# EAGLE board CT_schematic (EAGLE 7.6.0)

Size 100 x 80 mm. Coordinates in mm from the lower left corner, seen from the top.
Outline: 0,0 100,0 100,80 0,80 0,0
Copper layers (1*16): Top 0.035mm / dielectric 1.5mm / Bottom 0.035mm
Design rules "default": minimum track width 10mil, minimum drill 24mil, track to track 8mil, track to pad 8mil, pad to pad 8mil, via to via 8mil, smd to smd 8mil, copper to edge 40mil, drill to drill 8mil, minimum pad ring 10mil, minimum via ring 8mil, stop-mask expansion 4mil, vias tented up to drill 0mil, thermal gap 10mil

## Footprints (pad centres in the part's own frame; a part is rotated, then mirrored left to right if it is on the bottom)
C0603 = smd 0.8 x 0.8: 1 -0.762,0; 2 0.762,0
C0402 = smd 0.5 x 0.5: 1 -0.508,0; 2 0.508,0
C0805 = smd 1.2 x 1.3: 1 -1.016,0; 2 1.016,0
C1206 = smd 1.3 x 1.6: 1 -1.524,0; 2 1.524,0
2220 = smd 1.85 x 5.5: 1 -2.55,0; 2 2.55,0
EXV-9H = smd 3.505 x 1.676: 1 -2.857,0; 2 2.857,0
L0603 = smd 0.8 x 0.8: 1 -0.762,0; 2 0.762,0
L1210 = smd 1.2 x 2.5: 1 -1.524,0; 2 1.524,0
DR1040 = smd 1.6 x 3.2: 1 -4.458,0; 2 4.458,0
PJ-037B_PACKAGE = drill 3.7 square: 1 12,0 | drill 3.2 square: 2 6,0
R0603 = smd 0.8 x 0.8: 1 -0.762,0; 2 0.762,0
UFQFPN32 = smd 0.6 x 0.3: 1 -2.35,1.75; 2 -2.35,1.25; 3 -2.35,0.75; 4 -2.35,0.25; 5 -2.35,-0.25; 6 -2.35,-0.75; 7 -2.35,-1.25; 8 -2.35,-1.75; 17 2.35,-1.75; 18 2.35,-1.25; 19 2.35,-0.75; 20 2.35,-0.25; 21 2.35,0.25; 22 2.35,0.75; 23 2.35,1.25; 24 2.35,1.75 | smd 0.3 x 0.6: 9 -1.75,-2.35; 10 -1.25,-2.35; 11 -0.75,-2.35; 12 -0.25,-2.35; 13 0.25,-2.35; 14 0.75,-2.35; 15 1.25,-2.35; 16 1.75,-2.35; 25 1.75,2.35; 26 1.25,2.35; 27 0.75,2.35; 28 0.25,2.35; 29 -0.25,2.35; 30 -0.75,2.35; 31 -1.25,2.35; 32 -1.75,2.35 | smd 3.45 x 3.45: EPAD 0,0
SOIC-8 = smd 1.6 x 0.6: 1 -2.7,1.905 | smd 1.55 x 0.6: 2 -2.7,0.635; 3 -2.7,-0.635; 4 -2.7,-1.905; 5 2.7,-1.905; 6 2.7,-0.635; 7 2.7,0.635; 8 2.7,1.905
AT24C02D = smd 1.6 x 0.6: 1 -2.475,1.905 | smd 1.55 x 0.6: 2 -2.475,0.635; 3 -2.475,-0.635; 4 -2.475,-1.905; 5 2.475,-1.905; 6 2.475,-0.635; 7 2.475,0.635; 8 2.475,1.905
SSOP-20 = smd 1.651 x 0.432: 1 -3.48,2.925; 2 -3.48,2.275; 3 -3.48,1.625; 4 -3.48,0.975; 5 -3.48,0.325; 6 -3.48,-0.325; 7 -3.48,-0.975; 8 -3.48,-1.625; 9 -3.48,-2.275; 10 -3.48,-2.925; 11 3.48,-2.925; 12 3.48,-2.275; 13 3.48,-1.625; 14 3.48,-0.975; 15 3.48,-0.325; 16 3.48,0.325; 17 3.48,0.975; 18 3.48,1.625; 19 3.48,2.275; 20 3.48,2.925
182-009-MALE = drill 1.194 pad 1.524 octagon: 1 -5.537,10.923; 2 -2.769,10.923; 3 0,10.923; 4 2.769,10.923; 5 5.537,10.923; 6 -4.153,8.08; 7 -1.384,8.08; 8 1.384,8.08; 9 4.153,8.08 | hole 3.048: -12.446,9.501; 12.446,9.501
QFN-32 = smd 0.6 x 0.3: 1 -2.3,1.75; 2 -2.3,1.25; 3 -2.3,0.75; 4 -2.3,0.25; 5 -2.3,-0.25; 6 -2.3,-0.75; 7 -2.3,-1.25; 8 -2.3,-1.75; 17 2.3,-1.75; 18 2.3,-1.25; 19 2.3,-0.75; 20 2.3,-0.25; 21 2.3,0.25; 22 2.3,0.75; 23 2.3,1.25; 24 2.3,1.75 | smd 0.3 x 0.6: 9 -1.75,-2.3; 10 -1.25,-2.3; 11 -0.75,-2.3; 12 -0.25,-2.3; 13 0.25,-2.3; 14 0.75,-2.3; 15 1.25,-2.3; 16 1.75,-2.3; 25 1.75,2.3; 26 1.25,2.3; 27 0.75,2.3; 28 0.25,2.3; 29 -0.25,2.3; 30 -0.75,2.3; 31 -1.25,2.3; 32 -1.75,2.3 | smd 3.2 x 3.2: EXP 0,0
SJ-43515TS-SMT-TR = smd 2.2 x 3: 1 0.6,-7.4; 4 3.4,-7.4 | smd 3 x 3: 2 12.8,-7.4; 5 17,-3 | smd 2 x 3: 3 5.3,0; 6 2.5,0 | drill 1.8: P$7 4.5,-3.69; P$8 11.54,-3.69
WM-64PC = drill 0.6 pad 1: 1 -1,0.95; 2 -1,-0.95
ABLS-25.000MHZ-B2F-T = smd 5.6 x 2.8: 1 -3.81,0; 2 5.69,0
ASFL1 = smd 1.7 x 1.5: 1 -1.27,-1.1; 2 1.27,-1.1; 3 1.27,1.1; 4 -1.27,1.1
WSON-8 = smd 0.3 x 0.6: 1 -0.75,0; 2 0.05,0; 3 0.85,0; 4 1.65,0; 5 1.65,3.8; 6 0.85,3.8; 7 0.05,3.8; 8 -0.75,3.8 | smd 3 x 2.6: PAD 0.45,1.9
QFN-16_EP = smd 0.805 x 0.3: 1 -1.452,0.75; 2 -1.452,0.25; 3 -1.452,-0.25; 4 -1.452,-0.75; 9 1.452,-0.75; 10 1.452,-0.25; 11 1.452,0.25; 12 1.452,0.75 | smd 0.3 x 0.805: 5 -0.75,-1.452; 6 -0.25,-1.452; 7 0.25,-1.452; 8 0.75,-1.452; 13 0.75,1.452; 14 0.25,1.452; 15 -0.25,1.452; 16 -0.75,1.452 | smd 1.55 x 1.55: 17 0,0
SON-6 = smd 0.55 x 0.3: 1 -0.355,0.5 | smd 0.52 x 0.3: 2 -0.37,0; 3 -0.37,-0.5; 4 0.37,-0.5; 5 0.37,0; 6 0.37,0.5
SW_4-1437565-2 = smd 1.4 x 2.1: 1 -2.23,4.55; 2 -2.23,-4.55; 3 2.23,4.55; 4 2.23,-4.55
LGM67K-G1J2-24-Z = smd 0.8 x 1.4: A -2,0; C 0,0
NC7SZ125M5X = smd 1.3 x 0.7: 1 -1.3,0.95; 2 -1.3,0; 3 -1.3,-0.95; 4 1.3,-0.95; 5 1.3,0.95
DUMMY_PACKAGE_184 = drill 0.3: 1 0,-1; 2 1.5,-1; 3 3,-1

## Placement (x,y rotation side)
C1  1e-07  [C0603]  -78.74,76.2 0 top  (outside the outline)
C2  1e-07  [C0603]  -82.55,76.2 0 top  (outside the outline)
C3  1e-07  [C0603]  -86.36,76.2 0 top  (outside the outline)
C4  1e-07  [C0603]  -15.24,81.28 0 top  (outside the outline)
C5  4.7e-06  [C0603]  -74.93,76.2 0 top  (outside the outline)
C6  1e-08  [C0603]  -19.05,81.28 0 top  (outside the outline)
C7  1e-06  [C0603]  -22.86,81.28 0 top  (outside the outline)
C8  1e-11  [C0402]  -49.53,86.36 0 top  (outside the outline)
C9  1e-11  [C0402]  -53.34,86.36 0 top  (outside the outline)
C10  1e-08  [C0402]  -57.15,86.36 0 top  (outside the outline)
C11  1e-08  [C0402]  -60.96,86.36 0 top  (outside the outline)
C12  1e-06  [C0603]  -26.67,81.28 0 top  (outside the outline)
C13  1e-06  [C0603]  -30.48,81.28 0 top  (outside the outline)
C14  1e-06  [C0603]  -34.29,81.28 0 top  (outside the outline)
C15  4.7e-06  [C0805]  -34.29,71.12 0 top  (outside the outline)
C16  1e-06  [C0603]  -38.1,81.28 0 top  (outside the outline)
C17  1e-06  [C0603]  -41.91,81.28 0 top  (outside the outline)
C18  1e-06  [C0603]  -45.72,81.28 0 top  (outside the outline)
C19  1e-06  [C0603]  -49.53,81.28 0 top  (outside the outline)
C20  1e-06  [C0603]  -53.34,81.28 0 top  (outside the outline)
C21  1e-06  [C0603]  -57.15,81.28 0 top  (outside the outline)
C22  1e-06  [C0603]  -60.96,81.28 0 top  (outside the outline)
C23  1e-07  [C0402]  -64.77,86.36 0 top  (outside the outline)
C24  1e-07  [C0402]  -68.58,86.36 0 top  (outside the outline)
C25  1e-07  [C0402]  -72.39,86.36 0 top  (outside the outline)
C26  1e-07  [C0402]  -76.2,86.36 0 top  (outside the outline)
C27  1e-06  [C0603]  -64.77,81.28 0 top  (outside the outline)
C28  1e-08  [C0402]  -80.01,86.36 0 top  (outside the outline)
C29  1e-08  [C0402]  -83.82,86.36 0 top  (outside the outline)
C30  1e-05  [C1206]  -22.86,71.12 0 top  (outside the outline)
C31  1e-05  [C0805]  -39.37,71.12 0 top  (outside the outline)
C32  1e-05  [C0805]  -44.45,71.12 0 top  (outside the outline)
C33  1e-06  [C0603]  -68.58,81.28 0 top  (outside the outline)
C34  1e-07  [C0402]  -87.63,86.36 0 top  (outside the outline)
C35  6.8e-05  [2220]  -60.96,54.61 0 top  (outside the outline)
C36  1e-07  [C0402]  -15.24,91.44 0 top  (outside the outline)
C37  0.0001  [EXV-9H]  -36.83,63.5 0 top  (outside the outline)
C38  0.0001  [EXV-9H]  -48.26,63.5 0 top  (outside the outline)
C39  1e-08  [C0402]  -19.05,91.44 0 top  (outside the outline)
F1  240.0  [L0603]  -72.39,81.28 0 top  (outside the outline)
I1  1.5e-05  [L1210]  -16.51,71.12 0 top  (outside the outline)
I2  2.5e-06  [DR1040]  -38.1,41.91 0 top  (outside the outline)
J1  PJ-037B  [PJ-037B_PACKAGE]  -83.82,29.21 0 top  (outside the outline)
R1  10000.0  [R0603]  -85.09,69.85 0 top  (outside the outline)
R2  1000.0  [R0603]  -76.2,81.28 0 top  (outside the outline)
R3  1600.5  [R0603]  -80.01,81.28 0 top  (outside the outline)
R4  4700.0  [R0603]  -83.82,81.28 0 top  (outside the outline)
R5  2200.0  [R0603]  -15.24,86.36 0 top  (outside the outline)
R6  2200.0  [R0603]  -19.05,86.36 0 top  (outside the outline)
R7  10000.0  [R0603]  -15.24,76.2 0 top  (outside the outline)
R8  10000.0  [R0603]  -20.32,76.2 0 top  (outside the outline)
R9  10000.0  [R0603]  -25.4,76.2 0 top  (outside the outline)
R10  10000.0  [R0603]  -30.48,76.2 0 top  (outside the outline)
R11  10000.0  [R0603]  -35.56,76.2 0 top  (outside the outline)
R12  10000.0  [R0603]  -40.64,76.2 0 top  (outside the outline)
R13  10000.0  [R0603]  -45.72,76.2 0 top  (outside the outline)
R14  10000.0  [R0603]  -50.8,76.2 0 top  (outside the outline)
R15  100000.0  [R0603]  -49.53,69.85 0 top  (outside the outline)
R16  100000.0  [R0603]  -54.61,69.85 0 top  (outside the outline)
R17  100000.0  [R0603]  -59.69,69.85 0 top  (outside the outline)
R18  1270.0  [R0603]  -22.86,86.36 0 top  (outside the outline)
R19  1270.0  [R0603]  -26.67,86.36 0 top  (outside the outline)
R20  100000.0  [R0603]  -64.77,69.85 0 top  (outside the outline)
R21  200.0  [R0603]  -30.48,86.36 0 top  (outside the outline)
R22  1000.0  [R0603]  -34.29,86.36 0 top  (outside the outline)
R23  20000.0  [R0603]  -55.88,76.2 0 top  (outside the outline)
R24  91000.0  [R0603]  -60.96,76.2 0 top  (outside the outline)
R25  300000.0  [R0603]  -69.85,69.85 0 top  (outside the outline)
R26  10000.0  [R0603]  -66.04,76.2 0 top  (outside the outline)
R27  10000.0  [R0603]  -71.12,76.2 0 top  (outside the outline)
R28  9100.0  [R0603]  -38.1,86.36 0 top  (outside the outline)
R29  680000.0  [R0603]  -74.93,69.85 0 top  (outside the outline)
R30  120000.0  [R0603]  -80.01,69.85 0 top  (outside the outline)
U1  STM32F302K8U7  [UFQFPN32]  -81.28,41.91 0 top  (outside the outline)
U2  AT25160B-SSHL-T  [SOIC-8]  -41.91,54.61 0 top  (outside the outline)
U3  AT24C02D-SSHM-T  [AT24C02D]  -25.4,54.61 0 top  (outside the outline)
U4  MAX3218EAP+T  [SSOP-20]  -52.07,53.34 0 top  (outside the outline)
U5  182-009-113R531  [182-009-MALE]  -36.83,6.35 0 top  (outside the outline)
U6  SGTL5000XNAA3  [QFN-32]  -64.77,41.91 0 top  (outside the outline)
U7  SJ-43515TS-SMT-TR  [SJ-43515TS-SMT-TR]  -78.74,10.16 0 top  (outside the outline)
U8  SJ-43515TS-SMT-TR  [SJ-43515TS-SMT-TR]  -39.37,31.75 0 top  (outside the outline)
U9  SJ-43515TS-SMT-TR  [SJ-43515TS-SMT-TR]  -67.31,31.75 0 top  (outside the outline)
U10  WM-64PCT  [WM-64PC]  -50.8,41.91 0 top  (outside the outline)
U11  ABLS-25.000MHZ-B2F-T  [ABLS-25.000MHZ-B2F-T]  -67.31,63.5 0 top  (outside the outline)
U12  ASFL-24.57MHZ-NCS  [ASFL1]  -27.94,63.5 0 top  (outside the outline)
U13  LP3878SDX-ADJ/NOPB  [WSON-8]  -82.55,52.07 0 top  (outside the outline)
U14  LTC3601EUD#PBF  [QFN-16_EP]  -43.18,86.36 0 top  (outside the outline)
U15  TPS3895ADRYR  [SON-6]  -27.94,90.17 0 top  (outside the outline)
U16  4-1437565-2  [SW_4-1437565-2]  -27.94,43.18 0 top  (outside the outline)
U17  Q65110A2395  [LGM67K-G1J2-24-Z]  -78.74,62.23 0 top  (outside the outline)
U18  nc7sz125m5x  [NC7SZ125M5X]  -27.94,69.85 0 top  (outside the outline)
U19  Dummy  [DUMMY_PACKAGE_184]  -25.4,91.44 0 top  (outside the outline)

## Library data of the parts
C1-C39 F1 I1 I2 J1 R1-R30 U1-U19 = circuit_tree

## Nets
CLK_CRYSTAL_U1_2: C8.1 U1.2 U11.1
CLK_CRYSTAL_U1_3: C9.1 U1.3 U11.2
CLK_U6_21: U6.21 U12.3
GND: C1.2 C2.2 C3.2 C4.2 C5.2 C6.2 C7.2 C8.2 C9.2 C10.2 C11.2 C12.2 C13.2 C14.2 C23.2 C24.2 C25.2 C26.2 C27.2 C28.2 C29.2 C30.2 C31.2 C32.2 C33.2 C35.1 C35.2 C36.2 C37.2 C38.2 C39.2 J1.2 R2.2 R7.2 R11.2 R13.2 R14.2 R19.2 R22.2 R23.2 R25.2 R28.2 R30.2 U1.6 U1.16 U1.32 U1.EPAD U2.4 U3.4 U4.5 U4.17 U4.20 U5.5 U6.1 U6.3 U6.7 U6.EXP U8.1 U9.1 U10.2 U12.2 U13.3 U13.PAD U14.1 U14.9 U14.17 U15.2 U17.C U18.1 U18.3 U19.1
NET_U1_4: R4.1 U1.4 U18.4
NET_U1_5: C6.1 C7.1 F1.1 U1.5
NET_U1_24: R6.1 U1.24 U3.5
NET_U1_25: R5.1 U1.25 U3.6
NET_U1_29: R3.1 U1.29 U17.A
NET_U1_30: R1.1 U1.30 U16.3 U16.4
NET_U1_31: R7.1 U1.31
NET_U2_1: R9.1 U2.1
NET_U2_3: R8.1 U2.3
NET_U2_7: R10.1 U2.7
NET_U3_1: R12.1 U3.1
NET_U3_2: R13.1 U3.2
NET_U3_3: R14.1 U3.3
NET_U3_7: R11.1 U3.7
NET_U4_1: I1.1 U4.1
NET_U4_2: R15.1 U4.2
NET_U4_3: R16.1 U4.3
NET_U4_4: R17.1 U4.4
NET_U4_15: C14.1 U4.15
NET_U4_16: C15.2 U4.16
NET_U4_18: C15.1 U4.18
NET_U4_19: C13.1 U4.19
NET_U5_2: U4.12 U5.2
NET_U5_3: U4.14 U5.3
NET_U5_7: U4.11 U5.7
NET_U5_8: U4.13 U5.8
NET_U6_10: C26.1 U6.10
NET_U6_29: R18.1 U6.29
NET_U6_31: R19.1 U6.31
NET_U7_1: U6.4 U7.1
NET_U7_2: U6.2 U7.2
NET_U7_5: U6.6 U7.5
NET_U8_2: C17.1 U8.2
NET_U8_5: C16.1 U8.5
NET_U8_11: C17.2
NET_U8_12: C16.2
NET_U9_2: C19.1 C20.1 U9.2
NET_U9_5: C18.1 U9.5
NET_U9_13: C19.2 C20.2
NET_U9_14: C18.2
NET_U10_1: C21.1 C22.1 C27.1 U6.16 U10.1
NET_U10_15: C21.2 C22.2
NET_U13_1: C29.1 U13.1
NET_U13_6: R21.2 R22.1 U13.6
NET_U13_8: R20.1 U13.8
NET_U14_3: C34.2 I2.1 U14.3 U14.4
NET_U14_6: C34.1 U14.6
NET_U14_7: C33.1 U14.7 U14.12
NET_U14_10: R25.1 U14.10
NET_U14_11: R23.1 R24.1 U14.11
NET_U14_14: U14.14
NET_U14_ATNET_3: I2.2 R24.2
NET_U15_1: R27.1 R28.1 U15.1
NET_U15_3: R29.2 R30.1 U15.3
NET_U15_4: R26.1 U15.4 U18.2
NET_U16_1: R2.1 U16.1 U16.2
PROC_I2S3_CK: U1.26 U6.24
PROC_I2S3_EXT_SD: U1.27 U6.25
PROC_I2S3_SD: U1.28 U6.26
PROC_I2S3_WS: U1.11 U6.23
PROC_PA5: U1.12 U19.2
PROC_PA6: U1.13 U19.3
PROC_SPI2_MISO: U1.20 U2.2
PROC_SPI2_MOSI: U1.21 U2.5
PROC_USART2_CTS: U1.7 U4.8
PROC_USART2_RTS: U1.8 U4.10
PROC_USART2_RX: U1.10 U4.9
PROC_USART2_TX: U1.9 U4.7
VCC_S1_4V7: C30.1 C32.1 C37.1 C38.1 J1.1 R20.2 U13.4 U14.15 U14.16
VCC_TIER1_1V2: C23.1 C31.1 R21.1 U6.30 U13.5
VCC_TIER1_3V3: C1.1 C2.1 C3.1 C4.1 C5.1 C10.1 C11.1 C12.1 C24.1 C25.1 C28.1 C35.2 C36.1 C39.1 F1.2 I1.2 I2.2 R1.2 R3.2 R4.2 R5.2 R6.2 R8.2 R9.2 R10.2 R12.2 R15.2 R16.2 R17.2 R18.2 R24.2 R26.2 R27.2 R29.1 U1.1 U1.17 U2.8 U3.8 U4.6 U6.5 U6.20 U12.4 U14.8 U15.6 U18.5

## Tracks (layer width: path | path; a pad name or v marks a point on that pad's centre or on a via)
CLK_CRYSTAL_U1_2  (2 unrouted)
CLK_CRYSTAL_U1_3  (2 unrouted)
CLK_U6_21  (1 unrouted)
GND  (70 unrouted)
NET_U1_4  (2 unrouted)
NET_U1_5  (3 unrouted)
NET_U1_24  (2 unrouted)
NET_U1_25  (2 unrouted)
NET_U1_29  (2 unrouted)
NET_U1_30  (3 unrouted)
NET_U1_31  (1 unrouted)
NET_U2_1  (1 unrouted)
NET_U2_3  (1 unrouted)
NET_U2_7  (1 unrouted)
NET_U3_1  (1 unrouted)
NET_U3_2  (1 unrouted)
NET_U3_3  (1 unrouted)
NET_U3_7  (1 unrouted)
NET_U4_1  (1 unrouted)
NET_U4_2  (1 unrouted)
NET_U4_3  (1 unrouted)
NET_U4_4  (1 unrouted)
NET_U4_15  (1 unrouted)
NET_U4_16  (1 unrouted)
NET_U4_18  (1 unrouted)
NET_U4_19  (1 unrouted)
NET_U5_2  (1 unrouted)
NET_U5_3  (1 unrouted)
NET_U5_7  (1 unrouted)
NET_U5_8  (1 unrouted)
NET_U6_10  (1 unrouted)
NET_U6_29  (1 unrouted)
NET_U6_31  (1 unrouted)
NET_U7_1  (1 unrouted)
NET_U7_2  (1 unrouted)
NET_U7_5  (1 unrouted)
NET_U8_2  (1 unrouted)
NET_U8_5  (1 unrouted)
NET_U9_2  (2 unrouted)
NET_U9_5  (1 unrouted)
NET_U9_13  (1 unrouted)
NET_U10_1  (4 unrouted)
NET_U10_15  (1 unrouted)
NET_U13_1  (1 unrouted)
NET_U13_6  (2 unrouted)
NET_U13_8  (1 unrouted)
NET_U14_3  (3 unrouted)
NET_U14_6  (1 unrouted)
NET_U14_7  (2 unrouted)
NET_U14_10  (1 unrouted)
NET_U14_11  (2 unrouted)
NET_U14_ATNET_3  (1 unrouted)
NET_U15_1  (2 unrouted)
NET_U15_3  (2 unrouted)
NET_U15_4  (2 unrouted)
NET_U16_1  (2 unrouted)
PROC_I2S3_CK  (1 unrouted)
PROC_I2S3_EXT_SD  (1 unrouted)
PROC_I2S3_SD  (1 unrouted)
PROC_I2S3_WS  (1 unrouted)
PROC_PA5  (1 unrouted)
PROC_PA6  (1 unrouted)
PROC_SPI2_MISO  (1 unrouted)
PROC_SPI2_MOSI  (1 unrouted)
PROC_USART2_CTS  (1 unrouted)
PROC_USART2_RTS  (1 unrouted)
PROC_USART2_RX  (1 unrouted)
PROC_USART2_TX  (1 unrouted)
VCC_S1_4V7  (8 unrouted)
VCC_TIER1_1V2  (4 unrouted)
VCC_TIER1_3V3  (44 unrouted)